# EAGLE board silktest (EAGLE 7.4.0)

Size 67.6 x 35.15 mm. Coordinates in mm from the lower left corner, seen from the top.
Outline: 0.01,35.15 50.73,35.15 50.73,31.48 arc90 51.31,30.9 51.37,30.9 arc90 51.98,31.51
Outline: 51.96,31.55 51.96,35.14 67.48,35.14 67.48,17.13 arc90 65.49,15.14 65.49,14.84 arc90 67.43,12.9 67.5,12.9 67.5,0 0.13,0 0.13,12.89 arc90 2.11,14.87 2.11,15.17 arc90 0.14,17.14 0.13,17.14 arc-90 0.04,17.23 0.04,35.1
Copper layers (1*16): Top 0.035mm / dielectric 1.5mm / Bottom 0.035mm
Design rules "default": minimum track width 10mil, minimum drill 24mil, track to track 8mil, track to pad 8mil, pad to pad 8mil, via to via 8mil, smd to smd 8mil, copper to edge 40mil, drill to drill 8mil, minimum pad ring 10mil, minimum via ring 8mil, stop-mask expansion 4mil, vias tented up to drill 0mil, thermal gap 10mil

## Footprints (pad centres in the part's own frame; a part is rotated, then mirrored left to right if it is on the bottom)
FBGA-94-C = smd 0.45 x 0.45: A1 -4,7.2; A2 -3.2,7.2; A4 -1.6,7.2; A8 1.6,7.2; A10 3.2,7.2; A11 4,7.2; D1 -4,4.8; D2 -3.2,4.8; D3 -2.4,4.8; D4 -1.6,4.8; D8 1.6,4.8; D9 2.4,4.8; D10 3.2,4.8; D11 4,4.8; E2 -3.2,4; E3 -2.4,4; E4 -1.6,4; E8 1.6,4; E9 2.4,4; E10 3.2,4; F2 -3.2,3.2; F3 -2.4,3.2; F4 -1.6,3.2; F8 1.6,3.2; F9 2.4,3.2; F10 3.2,3.2; G2 -3.2,2.4; G3 -2.4,2.4; G4 -1.6,2.4; G8 1.6,2.4; G9 2.4,2.4; G10 3.2,2.4; H2 -3.2,1.6; H3 -2.4,1.6; H4 -1.6,1.6; H8 1.6,1.6; H9 2.4,1.6; H10 3.2,1.6; J2 -3.2,0.8; J3 -2.4,0.8; J4 -1.6,0.8; J8 1.6,0.8; J9 2.4,0.8; J10 3.2,0.8; K2 -3.2,0; K3 -2.4,0; K4 -1.6,0; K8 1.6,0; K9 2.4,0; K10 3.2,0; L2 -3.2,-0.8; L3 -2.4,-0.8; L4 -1.6,-0.8; L8 1.6,-0.8; L9 2.4,-0.8; L10 3.2,-0.8; M2 -3.2,-1.6; M3 -2.4,-1.6; M4 -1.6,-1.6; M8 1.6,-1.6; M9 2.4,-1.6; M10 3.2,-1.6; N2 -3.2,-2.4; N3 -2.4,-2.4; N4 -1.6,-2.4; N8 1.6,-2.4; N9 2.4,-2.4; N10 3.2,-2.4; P2 -3.2,-3.2; P3 -2.4,-3.2; P4 -1.6,-3.2; P8 1.6,-3.2; P9 2.4,-3.2; P10 3.2,-3.2; R2 -3.2,-4; R3 -2.4,-4; R4 -1.6,-4; R8 1.6,-4; R9 2.4,-4; R10 3.2,-4; T1 -4,-4.8; T2 -3.2,-4.8; T3 -2.4,-4.8; T4 -1.6,-4.8; T8 1.6,-4.8; T9 2.4,-4.8; T10 3.2,-4.8; T11 4,-4.8; W1 -4,-7.2; W2 -3.2,-7.2; W4 -1.6,-7.2; W8 1.6,-7.2; W10 3.2,-7.2; W11 4,-7.2
SODIMM_BOARD_SMALLER-67.6X35 = smd 0.45 x 2.3: 1 2.15,1.4; 3 2.75,1.4; 5 3.35,1.4; 7 3.95,1.4; 9 4.55,1.4; 11 5.15,1.4; 13 5.75,1.4; 15 6.35,1.4; 17 6.95,1.4; 19 7.55,1.4; 21 8.15,1.4; 23 8.75,1.4; 25 9.35,1.4; 27 9.95,1.4; 29 10.55,1.4; 31 11.15,1.4; 33 11.75,1.4; 35 12.35,1.4; 37 12.95,1.4; 39 13.55,1.4; 41 17.75,1.4; 43 18.35,1.4; 45 18.95,1.4; 47 19.55,1.4; 49 20.15,1.4; 51 20.75,1.4; 53 21.35,1.4; 55 21.95,1.4; 57 22.55,1.4; 59 23.15,1.4; 61 23.75,1.4; 63 24.35,1.4; 65 24.95,1.4; 67 25.55,1.4; 69 26.15,1.4; 71 26.75,1.4; 73 27.35,1.4; 75 27.95,1.4; 77 28.55,1.4; 79 29.15,1.4; 81 29.75,1.4; 83 30.35,1.4; 85 30.95,1.4; 87 31.55,1.4; 89 32.15,1.4; 91 32.75,1.4; 93 33.35,1.4; 95 33.95,1.4; 97 34.55,1.4; 99 35.15,1.4; 101 35.75,1.4; 103 36.35,1.4; 105 36.95,1.4; 107 37.55,1.4; 109 38.15,1.4; 111 38.75,1.4; 113 39.35,1.4; 115 39.95,1.4; 117 40.55,1.4; 119 41.15,1.4; 121 41.75,1.4; 123 42.35,1.4; 125 42.95,1.4; 127 43.55,1.4; 129 44.15,1.4; 131 44.75,1.4; 133 45.35,1.4; 135 45.95,1.4; 137 46.55,1.4; 139 47.15,1.4; 141 47.75,1.4; 143 48.35,1.4; 145 48.95,1.4; 147 49.55,1.4; 149 50.15,1.4; 151 50.75,1.4; 153 51.35,1.4; 155 51.95,1.4; 157 52.55,1.4; 159 53.15,1.4; 161 53.75,1.4; 163 54.35,1.4; 165 54.95,1.4; 167 55.55,1.4; 169 56.15,1.4; 171 56.75,1.4; 173 57.35,1.4; 175 57.95,1.4; 177 58.55,1.4; 179 59.15,1.4; 181 59.75,1.4; 183 60.35,1.4; 185 60.95,1.4; 187 61.55,1.4; 189 62.15,1.4; 191 62.75,1.4; 193 63.35,1.4; 195 63.95,1.4; 197 64.55,1.4; 199 65.15,1.4 | smd 0.45 x 2.3 bottom: 2 2.15,1.4; 4 2.75,1.4; 6 3.35,1.4; 8 3.95,1.4; 10 4.55,1.4; 12 5.15,1.4; 14 5.75,1.4; 16 6.35,1.4; 18 6.95,1.4; 20 7.55,1.4; 22 8.15,1.4; 24 8.75,1.4; 26 9.35,1.4; 28 9.95,1.4; 30 10.55,1.4; 32 11.15,1.4; 34 11.75,1.4; 36 12.35,1.4; 38 12.95,1.4; 40 13.55,1.4; 42 17.75,1.4; 44 18.35,1.4; 46 18.95,1.4; 48 19.55,1.4; 50 20.15,1.4; 52 20.75,1.4; 54 21.35,1.4; 56 21.95,1.4; 58 22.55,1.4; 60 23.15,1.4; 62 23.75,1.4; 64 24.35,1.4; 66 24.95,1.4; 68 25.55,1.4; 70 26.15,1.4; 72 26.75,1.4; 74 27.35,1.4; 76 27.95,1.4; 78 28.55,1.4; 80 29.15,1.4; 82 29.75,1.4; 84 30.35,1.4; 86 30.95,1.4; 88 31.55,1.4; 90 32.15,1.4; 92 32.75,1.4; 94 33.35,1.4; 96 33.95,1.4; 98 34.55,1.4; 100 35.15,1.4; 102 35.75,1.4; 104 36.35,1.4; 106 36.95,1.4; 108 37.55,1.4; 110 38.15,1.4; 112 38.75,1.4; 114 39.35,1.4; 116 39.95,1.4; 118 40.55,1.4; 120 41.15,1.4; 122 41.75,1.4; 124 42.35,1.4; 126 42.95,1.4; 128 43.55,1.4; 130 44.15,1.4; 132 44.75,1.4; 134 45.35,1.4; 136 45.95,1.4; 138 46.55,1.4; 140 47.15,1.4; 142 47.75,1.4; 144 48.35,1.4; 146 48.95,1.4; 148 49.55,1.4; 150 50.15,1.4; 152 50.75,1.4; 154 51.35,1.4; 156 51.95,1.4; 158 52.55,1.4; 160 53.15,1.4; 162 53.75,1.4; 164 54.35,1.4; 166 54.95,1.4; 168 55.55,1.4; 170 56.15,1.4; 172 56.75,1.4; 174 57.35,1.4; 176 57.95,1.4; 178 58.55,1.4; 180 59.15,1.4; 182 59.75,1.4; 184 60.35,1.4; 186 60.95,1.4; 188 61.55,1.4; 190 62.15,1.4; 192 62.75,1.4; 194 63.35,1.4; 196 63.95,1.4; 198 64.55,1.4; 200 65.15,1.4

## Placement (x,y rotation side)
IC1  K4B1G04(08/16)46C-128MB  [FBGA-94-C]  59.69,21.1 180 top
IC2  K4B1G04(08/16)46C-128MB  [FBGA-94-C]  41.61,20.68 0 top
IC3  K4B1G04(08/16)46C-128MB  [FBGA-94-C]  27.5,20.79 0 top
IC4  K4B1G04(08/16)46C-128MB  [FBGA-94-C]  10.63,23.36 270 top
SODIMM1  [SODIMM_BOARD_SMALLER-67.6X35]  67.6,35.01 180 top

## Library data of the parts
IC1-IC4 = memory-samsung; OC_FARNELL: unknown; OC_NEWARK: unknown
SODIMM1 = BaseApp

## Nets
N$1: IC1.K4 SODIMM1.10
N$2: IC1.J4 SODIMM1.9
N$3: IC1.N4 SODIMM1.12
N$4: IC1.P8 SODIMM1.13
N$5: IC1.P4 SODIMM1.14
N$6: IC1.N3 SODIMM1.15
N$7: IC1.P9 SODIMM1.16
N$8: IC1.P3 SODIMM1.17
N$9: IC1.R9 SODIMM1.18
N$10: IC1.R3 SODIMM1.19
N$11: IC1.T9 SODIMM1.20
N$12: IC1.R4 SODIMM1.21
N$13: IC1.L8 SODIMM1.22
N$14: IC1.R8 SODIMM1.23
N$15: IC1.N8 SODIMM1.24
N$16: IC1.H2 SODIMM1.1
N$17: IC1.L9 SODIMM1.4
N$18: IC1.M9 SODIMM1.2
N$19: IC1.T3 SODIMM1.3
N$20: SODIMM1.5
N$21: SODIMM1.6
N$22: SODIMM1.7
N$23: SODIMM1.8
N$24: IC1.L3 SODIMM1.11
N$25: IC1.E8 SODIMM1.25
N$26: IC2.K4 SODIMM1.36
N$27: IC2.J4 SODIMM1.35
N$28: IC2.N4 SODIMM1.38
N$29: IC2.P8 SODIMM1.39
N$30: IC2.P4 SODIMM1.40
N$31: IC2.N3 SODIMM1.41
N$32: IC2.P9 SODIMM1.42
N$33: IC2.P3 SODIMM1.43
N$34: IC2.R9 SODIMM1.44
N$35: IC2.R3 SODIMM1.45
N$36: IC2.T9 SODIMM1.46
N$37: IC2.R4 SODIMM1.47
N$38: IC2.L8 SODIMM1.48
N$39: IC2.R8 SODIMM1.49
N$40: IC2.N8 SODIMM1.50
N$41: IC2.H2 SODIMM1.27
N$42: IC2.L9 SODIMM1.30
N$43: IC2.M9 SODIMM1.28
N$44: IC1.L4 SODIMM1.26
N$45: IC1.G4 SODIMM1.51
N$46: IC1.F4 SODIMM1.52
N$47: IC1.M3 SODIMM1.53
N$48: IC1.N9 SODIMM1.54
N$49: IC1.M4 SODIMM1.55
N$50: IC1.E4 SODIMM1.56
N$51: IC1.F8 SODIMM1.57
N$52: IC1.F3 SODIMM1.58
N$53: IC1.F9 SODIMM1.59
N$54: IC2.T3 SODIMM1.60
N$55: IC3.K4 SODIMM1.186
N$56: IC3.J4 SODIMM1.185
N$57: IC3.N4 SODIMM1.188
N$58: IC3.P8 SODIMM1.189
N$59: IC3.P4 SODIMM1.190
N$60: IC3.N3 SODIMM1.191
N$61: IC3.P9 SODIMM1.192
N$62: IC3.P3 SODIMM1.193
N$63: IC3.R9 SODIMM1.194
N$64: IC3.R3 SODIMM1.195
N$65: IC3.T9 SODIMM1.196
N$66: IC3.R4 SODIMM1.197
N$67: IC3.L8 SODIMM1.198
N$68: IC3.R8 SODIMM1.199
N$69: IC3.N8 SODIMM1.200
N$70: IC3.H2 SODIMM1.177
N$71: IC3.L9 SODIMM1.180
N$72: IC3.M9 SODIMM1.178
N$73: IC4.K4 SODIMM1.160
N$74: IC4.J4 SODIMM1.159
N$75: IC4.N4 SODIMM1.162
N$76: IC4.P8 SODIMM1.163
N$77: IC4.P4 SODIMM1.164
N$78: IC4.N3 SODIMM1.165
N$79: IC4.P9 SODIMM1.166
N$80: IC4.P3 SODIMM1.167
N$81: IC4.R9 SODIMM1.168
N$82: IC4.R3 SODIMM1.169
N$83: IC4.T9 SODIMM1.170
N$84: IC4.R4 SODIMM1.171
N$85: IC4.L8 SODIMM1.172
N$86: IC4.R8 SODIMM1.173
N$87: IC4.N8 SODIMM1.174
N$88: IC4.H2 SODIMM1.151
N$89: IC4.L9 SODIMM1.154
N$90: IC4.M9 SODIMM1.152

## Tracks (layer width: path | path; a pad name or v marks a point on that pad's centre or on a via)
N$1  (1 unrouted)
N$2  (1 unrouted)
N$3  (1 unrouted)
N$4  (1 unrouted)
N$5  (1 unrouted)
N$6  (1 unrouted)
N$7  (1 unrouted)
N$8  (1 unrouted)
N$9  (1 unrouted)
N$10  (1 unrouted)
N$11  (1 unrouted)
N$12  (1 unrouted)
N$13  (1 unrouted)
N$14  (1 unrouted)
N$15  (1 unrouted)
N$16  (1 unrouted)
N$17  (1 unrouted)
N$18  (1 unrouted)
N$19  (1 unrouted)
N$24  (1 unrouted)
N$25  (1 unrouted)
N$26  (1 unrouted)
N$27  (1 unrouted)
N$28  (1 unrouted)
N$29  (1 unrouted)
N$30  (1 unrouted)
N$31  (1 unrouted)
N$32  (1 unrouted)
N$33  (1 unrouted)
N$34  (1 unrouted)
N$35  (1 unrouted)
N$36  (1 unrouted)
N$37  (1 unrouted)
N$38  (1 unrouted)
N$39  (1 unrouted)
N$40  (1 unrouted)
N$41  (1 unrouted)
N$42  (1 unrouted)
N$43  (1 unrouted)
N$44  (1 unrouted)
N$45  (1 unrouted)
N$46  (1 unrouted)
N$47  (1 unrouted)
N$48  (1 unrouted)
N$49  (1 unrouted)
N$50  (1 unrouted)
N$51  (1 unrouted)
N$52  (1 unrouted)
N$53  (1 unrouted)
N$54  (1 unrouted)
N$55  (1 unrouted)
N$56  (1 unrouted)
N$57  (1 unrouted)
N$58  (1 unrouted)
N$59  (1 unrouted)
N$60  (1 unrouted)
N$61  (1 unrouted)
N$62  (1 unrouted)
N$63  (1 unrouted)
N$64  (1 unrouted)
N$65  (1 unrouted)
N$66  (1 unrouted)
N$67  (1 unrouted)
N$68  (1 unrouted)
N$69  (1 unrouted)
N$70  (1 unrouted)
N$71  (1 unrouted)
N$72  (1 unrouted)
N$73  (1 unrouted)
N$74  (1 unrouted)
N$75  (1 unrouted)
N$76  (1 unrouted)
N$77  (1 unrouted)
N$78  (1 unrouted)
N$79  (1 unrouted)
N$80  (1 unrouted)
N$81  (1 unrouted)
N$82  (1 unrouted)
N$83  (1 unrouted)
N$84  (1 unrouted)
N$85  (1 unrouted)
N$86  (1 unrouted)
N$87  (1 unrouted)
N$88  (1 unrouted)
N$89  (1 unrouted)
N$90  (1 unrouted)